# Altium PCB PA_Combined_RX_TX.PcbDoc (part 3 of 3)
Units mil, origin at the board's own origin, x right, y up, seen from the top; angles counter-clockwise.
Board outline 4035 x 2725 mil, 4 copper layers (Top Layer, Layer 1, Layer 2, Bottom Layer), stack 23.756 mil thick; 184 components, 134 nets, 615 pads, 730 vias.
Unrouted connection lines stored in the file: 3.
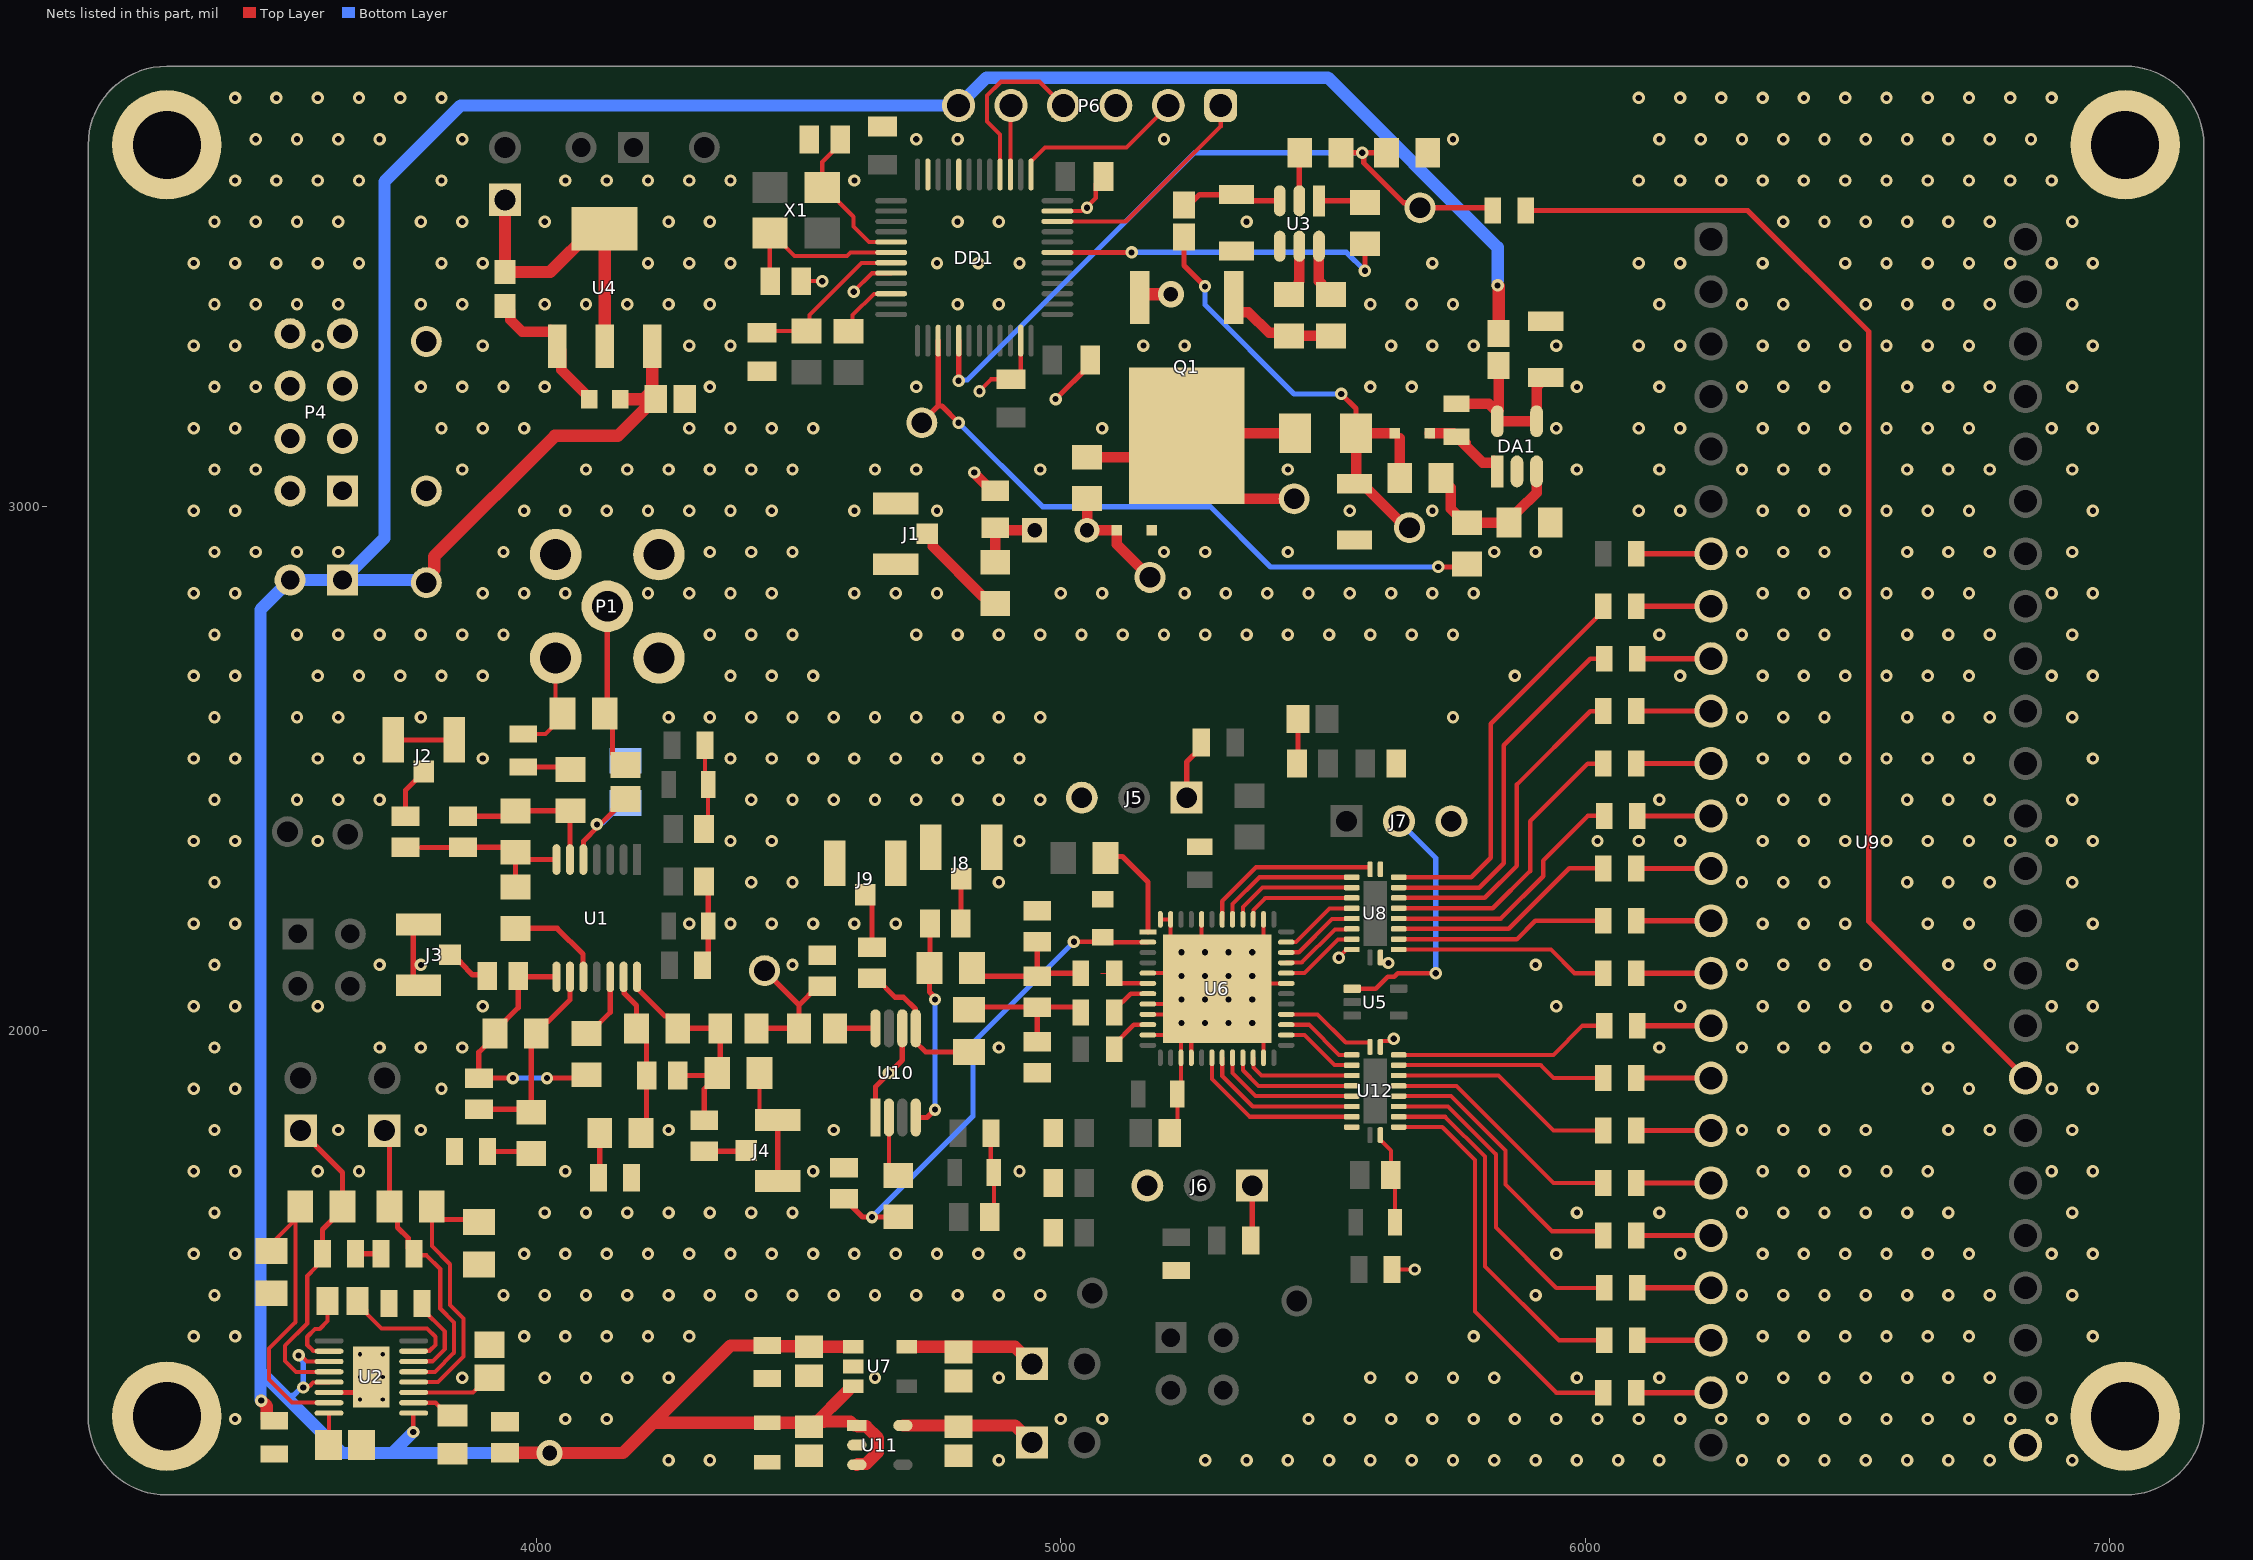
[diagram p4: the nets of this part, all layers, seen from the top]

## Via types
v1: diameter 23.62, hole 11.81, Top Layer to Bottom Layer, tented both sides, 656 vias
v2: diameter 23.62, hole 11.81, Top Layer to Bottom Layer, 66 vias
v3: diameter 19.68, hole 7.87, Top Layer to Bottom Layer, 6 vias
v4: diameter 50, hole 28, Top Layer to Bottom Layer, 2 vias

## Nets (pads, with @x,y where several pads share a name; then routed paths per layer and width w, separated by ;. In a path a pad name is that pad's centre, name@x,y a point inside that pad or via, vN(x,y) a via of type N, cw(c..) or ccw(c..) an arc to the next point about the centre after c; other vN are vias at no path point) (continued)
ADC_VCM: C49.1 C55.1 R40.1 U6.2 | length 958.5
  Top Layer w7.87: C55.1@4578.78,1680 C55.1@4586.65,1680 ; R40.1@4689.37,1645 R40.1@4690,1645.63 ; v2(5025,2170) 5071.42,2170 C49.1@5080,2178.58
  Top Layer w8.66: C49.1@5080,2168.58 5080.79,2169.37 U6.2@5166.12,2169.37
  Top Layer w10: C55.1@4584.53,1682.13 4621.65,1645 v2(4640,1645) R40.1@4689.37,1645
  Bottom Layer w10: v2(4640,1645) 4832.5,1837.5 4832.5,1977.5 v2(5025,2170)
ENC: DD1.10 R29.2 | length 124.6
  Top Layer w7.87: R29.2@4595,3334.37 4603.05,3342.42 4603.05,3365.19 4643.58,3405.73 4676.16,3405.73 DD1.10@4676.54,3406.1
GND: C1.2 C2.2 C3.2 C4.2 C5.2 C6.2 C7.1 C8.1 C9.2 C10.2 C11.2 C17.2 C20.2 C22.2 C23.2 C24.1 C29.1 C30.1 C31.2 C32.2 C33.1 C34.1 C35.2 C36.1 C37.2 C38.2 C39.2 C40.2 C41.2 C42.2 C43.2 C44.1 C45.2 C46.2 C47.2 C48.2 C49.2 C50.2 C51.1 C52.1 C54.1 C55.2 C57.1 C58.1 C59.2 C60.2 C63.2 C64.2 C65.2 C69.1 C70.2 C71.2 C72.2 C73.2 C74.2 D2.2 DA1.2 DD1.8 DD1.23 DD1.35 DD1.44 DD1.47 J1.2 J1.3 J2.2 J2.3 J3.2 J3.3 J4.2 J4.3 J5.3 J6.3 J7.3 J8.2 J8.3 J9.2 J9.3 P1.2 P4.1 P4.2 P4.3 P4.4 P4.5 P4.6 P4.7 P4.8 P6.3 pad.1 Q1.3 R2.1 R3.2 R4.1 R9.1 R10.1 R12.1 R24.1 R25.1 R28.1 R33.1 TP11.1 TP12.1 U2.14 U2.17 U3.4 U4.1 U6.5 U6.8 U6.9 U6.11 U6.15 U6.16 U6.23 U6.31 U6.38 U6.44 U6.47 U6.48 U6.49 U7.2 U8.1 U8.10 U8.19 U9.25 U10.1 U10.6 U11.2 U12.1 U12.10 U12.19 | length 4489.7
  Top Layer w7.87: C20.2@3975,2566.5 4017.05,2566.5 4049.65,2599.09 R9.1@4049.65,2605 4036.57,2618.07 P1.2@4036.57,2711.57 ; C9.2@4316.5,2125 C9.2@4327.4,2135.91 ; C11.2@4319.53,2285 C11.2@4327.4,2277.13 ; C5.2@4319.53,2385 4327.4,2392.87 C4.2@4327.4,2470 4321.5,2475.91 C3.2@4321.5,2545 ; R12.1@4425.35,1920 4425.35,1846.73 4442.09,1830 J4.3@4460,1830 ; C33.1@4505,3430 v2(4545,3430) ; v2(4605,3410) 4640.1,3445.1 4676.16,3445.1 DD1.8@4676.54,3445.47 ; v2(4845,3220) 4845,3220.95 4866.89,3242.84 C40.2@4905,3242.84 ; C65.2@4864.53,1645 4872.4,1652.87 C64.2@4872.4,1730 4866.5,1735.9 C63.2@4866.5,1805 ; C40.2@4908.82,3242.84 4923.58,3257.6 DD1.23@4923.58,3316.54 ; DD1.35@4993.46,3563.58 4993.84,3563.96 5039.7,3563.96 5045.74,3570 v2(5050,3570) ; v2@5049.55,3571.84 5066.65,3588.94 5066.65,3615.24 C43.2@5081.42,3630 ; U6.11@5166.12,1992.21 5198.65,1992.21 5223.75,2017.31 5223.75,2021.25 U6.49@5234.09,2031.58 ; U6.9@5166.12,2031.58 U6.49@5234.09,2031.58 ; U6.8@5166.12,2051.26 U6.49@5251.38,2051.26 ; U6.5@5166.12,2110.32 U6.49@5268.53,2110.32 ; U6.48@5189.79,2212.73 U6.47@5209.48,2212.73 5209.48,2169.37 U6.49@5268.53,2110.32 ; C69.1@5205.12,1805 5222.4,1822.28 C71.2@5222.4,1880 ; C71.2@5217.4,1880 5217.4,1891.81 5229.16,1903.57 U6.15@5229.16,1948.85 U6.49@5229.16,2011.89 ; v2(5230,2015) 5246.58,2031.58 U6.49@5248.85,2031.58 ; v2(5230,2060) 5242.64,2060 U6.49@5251.38,2051.26 ; U6.16@5248.85,1948.85 U6.49@5248.85,2031.58 ; U6.44@5268.53,2212.73 U6.49@5268.53,2110.32 ; U6.23@5386.64,1948.85 5386.64,1992.21 U6.49@5298.06,2080.79 ; U6.38@5386.64,2212.73 5386.64,2169.37 U6.49@5307.9,2090.63 ; U6.31@5430,2090.63 U6.49@5307.9,2090.63 ; C48.2@5450.47,2510 C48.2@5452.44,2511.97 ; v2(5530.41,2139.59) 5530.41,2140.56 5545.16,2155.31 U8.19@5555,2155.31 ; U12.1@5609.53,1801.42 5609.53,1791.58 5629.53,1771.58 C47.2@5629.53,1725 5637.4,1717.13 C46.2@5637.4,1635 ; U12.10@5609.53,1969.53 5609.53,1979.37 5610.71,1980.55 5626.29,1980.55 5630.74,1985 v2(5635,1985) ; U8.1@5609.53,2140.16 5609.53,2131.85 5610.71,2130.67 5623.66,2130.67 v2(5624.84,2129.49) ; C45.2@5631.5,1545 v2(5675,1545) ; U6.49@5234.09,2031.58 5283.3,2080.79 U6.49@5298.06,2080.79 ; U6.49@5234.09,2031.58 U6.49@5248.85,2031.58 ; U6.49@5248.85,2031.58 U6.49@5268.53,2051.26 ; U6.49@5251.38,2051.26 U6.49@5268.53,2051.26 ; U6.49@5268.53,2051.26 U6.49@5298.06,2080.79 ; U6.49@5268.53,2110.32 U6.49@5298.06,2080.79 ; U6.49@5298.06,2080.79 U6.49@5307.9,2090.63
  Top Layer w10: U2.14@3604.29,1310.47 3655.47,1310.47 U2.17@3685,1340 ; C1.2@3655,1575 C17.2@3703.5,1575 ; J2.3@3726.93,2555 J2.2@3843.07,2555 ; J3.3@3765,2083.86 J3.2@3765,2200 ; U4.1@4026.73,3341.93 4039.45,3329.21 U4.1@4039.45,3305.59 ; C9.2@4327.4,2135.91 C10.2@4327.4,2200 C11.2@4327.4,2277.13 ; J4.2@4460,1713.86 J4.3@4460,1830 ; U10.1@4646.61,1834.97 4646.61,1893.67 4672.2,1919.27 v2(4672.2,1919.68) ; v2@4672.41,1919.48 4697.8,1944.86 U10.6@4697.8,2005.03 ; v2@4835,3063.54 v2(4835,3065) ; R25.1@4868.11,3030.43 R25.1@4875,3030.43 ; v2(4990,3205) 4990.28,3205 5056.42,3271.14 C41.2@5056.42,3280 ; Q1.3@5150.24,3398.78 Q1.3@5156.46,3405 ; C48.2@5452.44,2511.97 C44.1@5452.44,2595
  Top Layer w20: C32.2@3940,3382.44 3949.92,3372.52 3949.92,3356.13 3972.44,3333.61 4031.73,3333.61 4039.45,3325.89 U4.1@4039.45,3305.59 4047.16,3297.87 4047.16,3260.73 4094.72,3213.17 4094.72,3210.75 C31.2@4100.47,3205 ; v2@4835,3063.54 R25.1@4868.11,3030.43
  Top Layer w23.62: TP11.1@3780.41,3315 TP11.1@3790,3315 ; Q1.3@5156.46,3405 v4(5210,3405)
  other v1: 4251.97,1181.1 4330.71,1181.1 4881.89,1181.1 5275.59,1181.1 5354.33,1181.1 5433.07,1181.1 5511.81,1181.1 5590.55,1181.1 5669.29,1181.1 5748.03,1181.1 5826.77,1181.1 5905.52,1181.1 5984.26,1181.1 6063,1181.1 6141.74,1181.1 6299.22,1181.1 6377.96,1181.1 6456.7,1181.1 6535.44,1181.1 6614.18,1181.1 6692.92,1181.1 6771.66,1181.1 6929.14,1181.1 3425.2,1259.84 4055.12,1259.84 4133.86,1259.84 5000,1259.84 5078.74,1259.84 5472.44,1259.84 5551.18,1259.84 5629.92,1259.84 5708.66,1259.84 5787.4,1259.84 5866.14,1259.84 5944.89,1259.84 6023.63,1259.84 6102.37,1259.84 6181.11,1259.84 6259.85,1259.84 6338.59,1259.84 6417.33,1259.84 6496.07,1259.84 6574.81,1259.84 6653.55,1259.84 6732.29,1259.84 6811.03,1259.84 6889.77,1259.84 3858.27,1338.58 4015.75,1338.58 4094.49,1338.58 4173.23,1338.58 4251.97,1338.58 4645.67,1338.58 4881.89,1338.58 5590.55,1338.58 5669.29,1338.58 5748.03,1338.58 5826.77,1338.58 5984.26,1338.58 6141.74,1338.58 6299.22,1338.58 6377.96,1338.58 6456.7,1338.58 6535.44,1338.58 6614.18,1338.58 6692.92,1338.58 6771.66,1338.58 3346.46,1417.32 3425.2,1417.32 3976.38,1417.32 4055.12,1417.32 4133.86,1417.32 4212.6,1417.32 4291.34,1417.32 5787.4,1417.32 6338.59,1417.32 6417.33,1417.32 6496.07,1417.32 6574.81,1417.32 6653.55,1417.32 6732.29,1417.32 6968.51,1417.32 3385.83,1496.06 3937.01,1496.06 4015.75,1496.06 4094.49,1496.06 4173.23,1496.06 4251.97,1496.06 4330.71,1496.06 4409.45,1496.06 4488.19,1496.06 4566.93,1496.06 4645.67,1496.06 4724.41,1496.06 4803.15,1496.06 4881.89,1496.06 4960.63,1496.06 5905.52,1496.06 6299.22,1496.06 6377.96,1496.06 6456.7,1496.06 6535.44,1496.06 6614.18,1496.06 6692.92,1496.06 6771.66,1496.06 6929.14,1496.06 3346.46,1574.8 3425.2,1574.8 3976.38,1574.8 4055.12,1574.8 4133.86,1574.8 4212.6,1574.8 4291.34,1574.8 4370.08,1574.8 4448.82,1574.8 4527.56,1574.8 4606.3,1574.8 4685.04,1574.8 4763.78,1574.8 4842.52,1574.8 4921.26,1574.8 5944.89,1574.8 6181.11,1574.8 6338.59,1574.8 6417.33,1574.8 6496.07,1574.8 6574.81,1574.8 6653.55,1574.8 6732.29,1574.8 6889.77,1574.8 6968.51,1574.8 3385.83,1653.54 4015.75,1653.54 4094.49,1653.54 4173.23,1653.54 4251.97,1653.54 4330.71,1653.54 4409.45,1653.54 4488.19,1653.54 5984.26,1653.54 6141.74,1653.54 6299.22,1653.54 6377.96,1653.54 6456.7,1653.54 6535.44,1653.54 6614.18,1653.54 6692.92,1653.54 6929.14,1653.54 3346.46,1732.28 3425.2,1732.28 3582.68,1732.28 3661.42,1732.28 4055.12,1732.28 4527.56,1732.28 4921.26,1732.28 6338.59,1732.28 6417.33,1732.28 6496.07,1732.28 6574.81,1732.28 6653.55,1732.28 6889.77,1732.28 6968.51,1732.28 3385.83,1811.02 3622.05,1811.02 3779.53,1811.02 4251.97,1811.02 4566.93,1811.02 6299.22,1811.02 6377.96,1811.02 6456.7,1811.02 6535.44,1811.02 6692.92,1811.02 6771.66,1811.02 6929.14,1811.02 3346.46,1889.76 3425.2,1889.76 3818.9,1889.76 6653.55,1889.76 6732.29,1889.76 6889.77,1889.76 6968.51,1889.76 3385.83,1968.51 3700.79,1968.51 3779.53,1968.51 3858.27,1968.51 4881.89,1968.51 6141.74,1968.51 6299.22,1968.51 6377.96,1968.51 6456.7,1968.51 6535.44,1968.51 6614.18,1968.51 6692.92,1968.51 6929.14,1968.51 3346.46,2047.25 3425.2,2047.25 3582.68,2047.25 3897.64,2047.25 5944.89,2047.25 6181.11,2047.25 6338.59,2047.25 6417.33,2047.25 6496.07,2047.25 6574.81,2047.25 6653.55,2047.25 6889.77,2047.25 6968.51,2047.25 3385.83,2125.99 3700.79,2125.99 3779.53,2125.99 4488.19,2125.99 5905.52,2125.99 6299.22,2125.99 6377.96,2125.99 6456.7,2125.99 6535.44,2125.99 6692.92,2125.99 6771.66,2125.99 6929.14,2125.99 3346.46,2204.73 3425.2,2204.73 4291.34,2204.73 4370.08,2204.73 4448.82,2204.73 4527.56,2204.73 4606.3,2204.73 4685.04,2204.73 6338.59,2204.73 6417.33,2204.73 6496.07,2204.73 6653.55,2204.73 6732.29,2204.73 6968.51,2204.73 3385.83,2283.47 4409.45,2283.47 4488.19,2283.47 4881.89,2283.47 6299.22,2283.47 6377.96,2283.47 6456.7,2283.47 6614.18,2283.47 6692.92,2283.47 6771.66,2283.47 6929.14,2283.47 3346.46,2362.21 3425.2,2362.21 3582.68,2362.21 4370.08,2362.21 4448.82,2362.21 4921.26,2362.21 6023.63,2362.21 6102.37,2362.21 6181.11,2362.21 6338.59,2362.21 6417.33,2362.21 6496.07,2362.21 6574.81,2362.21 6653.55,2362.21 6732.29,2362.21 6811.03,2362.21 6889.77,2362.21 6968.51,2362.21 3385.83,2440.95 3543.31,2440.95 3622.05,2440.95 3700.79,2440.95 4409.45,2440.95 4488.19,2440.95 4566.93,2440.95 4645.67,2440.95 4724.41,2440.95 4803.15,2440.95 4881.89,2440.95 4960.63,2440.95 6141.74,2440.95 6299.22,2440.95 6377.96,2440.95 6456.7,2440.95 6614.18,2440.95 6692.92,2440.95 6771.66,2440.95 6929.14,2440.95 3346.46,2519.69 3425.2,2519.69 3582.68,2519.69 3661.42,2519.69 3897.64,2519.69 4370.08,2519.69 4448.82,2519.69 4527.56,2519.69 4606.3,2519.69 4685.04,2519.69 4763.78,2519.69 4842.52,2519.69 4921.26,2519.69 6338.59,2519.69 6417.33,2519.69 6496.07,2519.69 6574.81,2519.69 6653.55,2519.69 6732.29,2519.69 6968.51,2519.69 3385.83,2598.43 3543.31,2598.43 3622.05,2598.43 3779.53,2598.43 4251.97,2598.43 4330.71,2598.43 4409.45,2598.43 4488.19,2598.43 4566.93,2598.43 4645.67,2598.43 4724.41,2598.43 4803.15,2598.43 4881.89,2598.43 4960.63,2598.43 5748.03,2598.43 6299.22,2598.43 6377.96,2598.43 6456.7,2598.43 6614.18,2598.43 6692.92,2598.43 6771.66,2598.43 6929.14,2598.43 3346.46,2677.17 3425.2,2677.17 3582.68,2677.17 3661.42,2677.17 3740.16,2677.17 3818.9,2677.17 3897.64,2677.17 4370.08,2677.17 4448.82,2677.17 4527.56,2677.17 5866.14,2677.17 6181.11,2677.17 6338.59,2677.17 6417.33,2677.17 6496.07,2677.17 6574.81,2677.17 6653.55,2677.17 6732.29,2677.17 6889.77,2677.17 6968.51,2677.17 3385.83,2755.91 3543.31,2755.91 3622.05,2755.91 3700.79,2755.91 3779.53,2755.91 3858.27,2755.91 3937.01,2755.91 4330.71,2755.91 4409.45,2755.91 4488.19,2755.91 4724.41,2755.91 4803.15,2755.91 4881.89,2755.91 4960.63,2755.91 5039.37,2755.91 5118.11,2755.91 5196.85,2755.91 5275.59,2755.91 5354.33,2755.91 5433.07,2755.91 5511.81,2755.91 5590.55,2755.91 5669.29,2755.91 5748.03,2755.91 6141.74,2755.91 6299.22,2755.91 6377.96,2755.91 6456.7,2755.91 6614.18,2755.91 6692.92,2755.91 6771.66,2755.91 6929.14,2755.91 3346.46,2834.65 3425.2,2834.65 3897.64,2834.65 3976.38,2834.65 4055.12,2834.65 4212.6,2834.65 4291.34,2834.65 4370.08,2834.65 4448.82,2834.65 4606.3,2834.65 4685.04,2834.65 4763.78,2834.65 5000,2834.65 5078.74,2834.65 5236.22,2834.65 5314.96,2834.65 5393.7,2834.65 5472.44,2834.65 5551.18,2834.65 5629.92,2834.65 5708.66,2834.65 5787.4,2834.65 6338.59,2834.65 6417.33,2834.65 6496.07,2834.65 6574.81,2834.65 6653.55,2834.65 6732.29,2834.65 6889.77,2834.65 6968.51,2834.65 3385.83,2913.39 3464.57,2913.39 3543.31,2913.39 3622.05,2913.39 3937.01,2913.39 4330.71,2913.39 4409.45,2913.39 4488.19,2913.39 5196.85,2913.39 5275.59,2913.39 5433.07,2913.39 5826.77,2913.39 5905.52,2913.39 6299.22,2913.39 6377.96,2913.39 6456.7,2913.39 6614.18,2913.39 6692.92,2913.39 6771.66,2913.39 6929.14,2913.39 3346.46,2992.13 3425.2,2992.13 3976.38,2992.13 4055.12,2992.13 4133.86,2992.13 4212.6,2992.13 4291.34,2992.13 4370.08,2992.13 4448.82,2992.13 4606.3,2992.13 4763.78,2992.13 5551.18,2992.13 5708.66,2992.13 6102.37,2992.13 6181.11,2992.13 6338.59,2992.13 6417.33,2992.13 6496.07,2992.13 6574.81,2992.13 6653.55,2992.13 6732.29,2992.13 6968.51,2992.13 3385.83,3070.87 3464.57,3070.87 3858.27,3070.87 4094.49,3070.87 4173.23,3070.87 4251.97,3070.87 4330.71,3070.87 4409.45,3070.87 4488.19,3070.87 4645.67,3070.87 4724.41,3070.87 4960.63,3070.87 5433.07,3070.87 5984.26,3070.87 6141.74,3070.87 6299.22,3070.87 6377.96,3070.87 6456.7,3070.87 6614.18,3070.87 6692.92,3070.87 6771.66,3070.87 6929.14,3070.87 3346.46,3149.61 3425.2,3149.61 3818.9,3149.61 3897.64,3149.61 3976.38,3149.61 4291.34,3149.61 4370.08,3149.61 4448.82,3149.61 4527.56,3149.61 5078.74,3149.61 5944.89,3149.61 6102.37,3149.61 6181.11,3149.61 6338.59,3149.61 6417.33,3149.61 6496.07,3149.61 6574.81,3149.61 6653.55,3149.61 6732.29,3149.61 6889.77,3149.61 6968.51,3149.61 3385.83,3228.35 3464.57,3228.35 3779.53,3228.35 3858.27,3228.35 3937.01,3228.35 4015.75,3228.35 4330.71,3228.35 4724.41,3228.35 5590.55,3228.35 5669.29,3228.35 5984.26,3228.35 6141.74,3228.35 6299.22,3228.35 6377.96,3228.35 6456.7,3228.35 6614.18,3228.35 6692.92,3228.35 6771.66,3228.35 6929.14,3228.35 3346.46,3307.09 3425.2,3307.09 3582.68,3307.09 3897.64,3307.09 4291.34,3307.09 4370.08,3307.09 5157.48,3307.09 5236.22,3307.09 5629.92,3307.09 5708.66,3307.09 5787.4,3307.09 5944.89,3307.09 6102.37,3307.09 6181.11,3307.09 6338.59,3307.09 6417.33,3307.09 6496.07,3307.09 6574.81,3307.09 6653.55,3307.09 6732.29,3307.09 6968.51,3307.09 3385.83,3385.83 3464.57,3385.83 3543.31,3385.83 3622.05,3385.83 3779.53,3385.83 3858.27,3385.83 4015.75,3385.83 4094.49,3385.83 4173.23,3385.83 4251.97,3385.83 4330.71,3385.83 4803.15,3385.83 4881.89,3385.83 5590.55,3385.83 5669.29,3385.83 5748.03,3385.83 6141.74,3385.83 6299.22,3385.83 6377.96,3385.83 6535.44,3385.83 6614.18,3385.83 6692.92,3385.83 6771.66,3385.83 6929.14,3385.83 3346.46,3464.57 3425.2,3464.57 3503.94,3464.57 3582.68,3464.57 3661.42,3464.57 3818.9,3464.57 3897.64,3464.57 4212.6,3464.57 4291.34,3464.57 4370.08,3464.57 4763.78,3464.57 4842.52,3464.57 4921.26,3464.57 5708.66,3464.57 6102.37,3464.57 6181.11,3464.57 6338.59,3464.57 6496.07,3464.57 6574.81,3464.57 6653.55,3464.57 6732.29,3464.57 6811.03,3464.57 6889.77,3464.57 6968.51,3464.57 3385.83,3543.31 3464.57,3543.31 3543.31,3543.31 3622.05,3543.31 3779.53,3543.31 3858.27,3543.31 4015.75,3543.31 4251.97,3543.31 4330.71,3543.31 4803.15,3543.31 4881.89,3543.31 5354.33,3543.31 6377.96,3543.31 6456.7,3543.31 6535.44,3543.31 6614.18,3543.31 6692.92,3543.31 6771.66,3543.31 6929.14,3543.31 3425.2,3622.05 3503.94,3622.05 3582.68,3622.05 3661.42,3622.05 3818.9,3622.05 4055.12,3622.05 4133.86,3622.05 4212.6,3622.05 4291.34,3622.05 4370.08,3622.05 4606.3,3622.05 6102.37,3622.05 6181.11,3622.05 6259.85,3622.05 6338.59,3622.05 6417.33,3622.05 6496.07,3622.05 6574.81,3622.05 6653.55,3622.05 6732.29,3622.05 6811.03,3622.05 6889.77,3622.05 3464.57,3700.79 3543.31,3700.79 3622.05,3700.79 3700.79,3700.79 3858.27,3700.79 4724.41,3700.79 4803.15,3700.79 5196.85,3700.79 5748.03,3700.79 6141.74,3700.79 6220.48,3700.79 6299.22,3700.79 6377.96,3700.79 6456.7,3700.79 6535.44,3700.79 6614.18,3700.79 6692.92,3700.79 6771.66,3700.79 6850.4,3700.79 3425.2,3779.53 3503.94,3779.53 3582.68,3779.53 3661.42,3779.53 3740.16,3779.53 3818.9,3779.53 6102.37,3779.53 6181.11,3779.53 6259.85,3779.53 6338.59,3779.53 6417.33,3779.53 6496.07,3779.53 6574.81,3779.53 6653.55,3779.53 6732.29,3779.53 6811.03,3779.53 6889.77,3779.53
  other v2: 5275,2015 5320,2015 5365,2015 5275,2060 5320,2060 5365,2060 5230,2105 5275,2105 5320,2105 5365,2105 5230,2150 5275,2150 5320,2150 5365,2150
  other v3: 3663.35,1296.69 3706.65,1296.69 3663.35,1340 3706.65,1340 3663.35,1383.31 3706.65,1383.31
LASER_DAC: DD1.15 R27.1 TP7.1 | length 1307.8
  Top Layer w10: TP7.1@4735,3160 4735,3160.77 4766.1,3191.87 ; DD1.15@4766.1,3316.54 4766.1,3191.87 ; v2(4805,3160) 4773.13,3191.87 4766.1,3191.87 ; v2(5720,2885) 5769.37,2885 R27.1@5775,2890.63
  Bottom Layer w10: v2(4805,3160) 4965,3000 5285,3000 5400,2885 v2(5720,2885)
LASER_PULSE: DD1.17 R20.2 R24.2 R60.2 TP8.1 | length 1401.8
  Top Layer w10: v2(4805,3240) 4805.47,3240.47 4805.47,3270.79 4805.24,3271.02 DD1.17@4805.24,3316.54 ; R20.2@5545.28,3675 v2(5575,3675) 5577.61,3672.39 5577.61,3655.77 5653.99,3579.39 5675.61,3579.39 TP8.1@5685,3570 5818.5,3570 R60.2@5823.5,3565 ; v2@5580,3675 R24.2@5621.26,3675
  Bottom Layer w10: v2(4805,3240) 4806.46,3241.46 4821.46,3241.46 5255,3675 v2(5575,3675)
LTC3260_ADJ+: R1.1 R2.2 U2.15 | length 599.1
  Top Layer w7.87: R2.2@3500,1600 R1.1@3540,1640 ; U2.15@3608.8,1291.16 3533.84,1291.16 3490,1335 3490,1394.47 3540,1444.47 R1.1@3540,1640 ; R1.1@3540,1640 3565,1665 R1.1@3549.29,1665 3540,1655.71 R1.1@3540,1640
LTC3260_ADJ-: R3.1 R5.2 U2.4 | length 529.2
  Top Layer w7.87: U2.4@3765.71,1330.16 3812.11,1330.16 3860.83,1378.88 3860.83,1451.52 3835,1477.35 3835,1555 3800.35,1589.65 R5.2@3800.35,1659.96
  Top Layer w10: R5.2@3800.35,1665 3800.35,1659.96 3819.96,1640.35 R3.1@3895,1640.35
LTC3260_BYP+: C7.2 U2.16 | length 61.4
  Top Layer w7.87: C7.2@3603.5,1210 3604.29,1210.79 U2.16@3604.29,1271.1
LTC3260_BYP-: C8.2 U2.3 | length 155.9
  Top Layer w7.87: U2.3@3765.71,1310.47 3879.02,1310.47 3907.05,1338.5 C8.2@3910,1338.5
LTC3260_LDO+: C1.1 R1.2 U2.12 W1.1 | length 610.3
  Top Layer w7.87: C1.1@3592.01,1575 3579.7,1562.7 3579.7,1549.7 3562.8,1532.8 3562.8,1441.99 3520.49,1399.68 3520.49,1370.57 3541.21,1349.84 U2.12@3604.29,1349.84
  Top Layer w10: W1.1@3550,1810 3630,1730 R1.2@3630,1665 3630,1659.09 3592.01,1621.1 C1.1@3592.01,1575
LTC3260_LDO-: C17.1 R5.1 U2.5 W2.1 | length 583.2
  Top Layer w7.87: U2.5@3765.71,1349.84 3806.52,1349.84 3842.95,1386.28 3842.95,1444.12 3816.44,1470.63 3816.44,1545.59 3789.93,1572.1 3769.39,1572.1 C17.1@3766.5,1575
  Top Layer w10: W2.1@3710,1810 3719.65,1800.35 R5.1@3719.65,1665 3735,1649.65 3735,1625 3755.26,1604.74 3755.26,1586.24 C17.1@3766.5,1575
NetC6_1: C6.1 U2.6 | length 173.7
  Top Layer w7.87: U2.6@3765.71,1369.53 3766.09,1369.9 3801.3,1369.9 3825.08,1393.68 3825.08,1426.57 3781.5,1470.16 C6.1@3781.5,1480
NetC12_1: C12.1 J2.1 | length 99.9
  Top Layer w10: C12.1@3750,2409.53 3750,2458.97 3785,2493.98 J2.1@3785,2494.96
NetC12_2: C12.2 C18.2 R6.1 R11.2 U1.7 | length 332
  Top Layer w10: 3779.53,2350 3859.53,2350 C18.2@3860,2350.47 3950.16,2350.47 R11.2@3960,2340.63 R6.1@3960,2274.37 ; R11.2@3964.96,2345.59 3983.69,2326.86 U1.7@4038.23,2326.86
NetC13_1: C13.1 J3.1 | length 83
  Top Layer w10: J3.1@3840.04,2145 3841.02,2145 3855.71,2130.31 3855.71,2129.33 3878.1,2106.94 3904.01,2106.94 C13.1@3905.94,2105
NetC13_2: C13.2 C19.2 R7.1 R13.2 U1.8 | length 508.3
  Top Layer w10: v2(3955,1910) 3890.47,1910 C19.2@3890,1909.53 3890,1959.45 3920.63,1990.08 R13.2@3920.63,1995 3920.63,1999.92 3965,2044.29 C13.2@3965,2105 3966.86,2103.14 U1.8@4038.23,2103.14 ; v2(4020,1910) 4088.74,1910 R7.1@4095,1916.26
  Bottom Layer w10: v2(3955,1910) v2(4020,1910)
NetC14_1: C14.1 J4.1 | length 80.6
  Top Layer w10: C14.1@4320,1770.47 4398.5,1770.47 J4.1@4399.96,1771.93
NetC14_2: C14.2 C21.2 R8.1 R12.2 R14.2 U1.14 | length 478.8
  Top Layer w10: U1.14@4191.77,2103.14 4191.77,2081.34 4244.57,2028.54 4250.75,2028.54 4269.37,2009.92 R14.2@4269.37,2005 R8.1@4350.55,2005 4350.55,1920 4320,1889.45 C14.2@4320,1829.53 ; C21.2@4269.06,1915 R12.2@4344.65,1915
NetC15_1: C15.1 U2.10 | length 151.5
  Top Layer w7.87: C15.1@3601.43,1485 3601.43,1446.49 3586.53,1431.6 3577.69,1431.6 3562.8,1416.71 3562.8,1401.09 3574.29,1389.59 3603.92,1389.59 U2.10@3604.29,1389.21
NetC15_2: C15.2 U2.7 | length 243.1
  Top Layer w7.87: C15.2@3658.57,1485 3675.4,1468.18 3675.4,1461.07 3704.04,1432.43 3791.49,1432.43 3807.21,1416.71 3807.21,1401.09 3796.16,1390.04 3790.57,1390.04 3790.12,1389.59 3766.09,1389.59 U2.7@3765.71,1389.21
NetC16_1: C16.1 P1.1 R9.2 | length 323.2
  Top Layer w10: P1.1@4135,2810 4135,2609.65 R9.2@4130.35,2605 4145,2590.35 4145,2528.54 4166.03,2507.51 C16.1@4170,2507.51
NetC16_2: C16.2 R10.2 U1.5 | length 228
  Top Layer w10: U1.5@4089.41,2326.86 4089.41,2361.9 v2@4117.87,2390.36 ; v2(4115.21,2393.91) 4114.77,2393.46 v2@4117.87,2390.36 ; C16.2@4170,2442.49 4166.03,2442.49 4146.33,2422.79 4146.33,2418.82 v2@4117.87,2390.36
  Bottom Layer w10: v2(4115.21,2393.91) 4117.82,2396.51 4125.96,2396.51 4164.09,2434.65 R10.2@4170,2434.65
NetC18_1: C18.1 R11.1 R15.1 U1.6 | length 298.3
  Top Layer w10: C18.1@3860,2409.53 3950.16,2409.53 R11.1@3960,2419.37 ; R11.1@3964.37,2420 R15.1@4065,2420 4063.82,2418.82 U1.6@4063.82,2326.86
NetC19_1: C19.1 R13.1 R16.1 U1.9 | length 393.9
  Top Layer w10: C19.1@3890,1850.47 3984.53,1850.47 R16.1@3990,1845 3990,1985.63 R13.1@3999.37,1995 3999.37,1999.92 4017.99,2018.54 4022.91,2018.54 4063.82,2059.45 U1.9@4063.82,2103.14
NetC20_1: C20.1 R15.2 | length 92
  Top Layer w10: C20.1@3975,2503.5 4060.24,2503.5 R15.2@4065,2498.74
NetC21_1: C21.1 R14.1 R17.1 U1.13 | length 296.6
  Top Layer w10: U1.13@4166.18,2103.14 4167.14,2102.19 4167.14,2072.04 4190.63,2048.54 R14.1@4190.63,2005 4190.63,2000.08 4210,1980.71 C21.1@4210,1915 4210,1825.63 R17.1@4210.63,1825
NetC22_1: C22.1 R16.2 | length 90.1
  Top Layer w10: C22.1@3901.5,1770 3986.26,1770 R16.2@3990,1766.26
NetC23_1: C23.1 R17.2 | length 85.9
  Top Layer w10: C23.1@4118.5,1720 4120.63,1722.13 R17.2@4120.63,1805
NetC24_2: C24.2 L1.2 U3.3 | length 190.4
  Top Layer w10: L1.2@5245,3570.55 5245,3575.43 5264.57,3595 C24.2@5335,3595 5346.67,3583.33 U3.3@5417.6,3583.33
NetC25_1: C25.1 D1.2 D2.1 TP9.1 | length 233.5
  Top Layer w20: C25.1@5050,3015.63 D1.2@5050,2955 D2.1@5106.54,2955 5106.54,2928.46 TP9.1@5170,2865
NetC25_2: C25.2 Q1.2 R18.1 TP10.1 | length 679.1
  Top Layer w10: Q1.2@5199.37,3094.37 Q1.2@5240,3135 ; Q1.2@5245,3140 Q1.2@5240,3135 ; Q1.2@5345.24,3015 5240,3120.24 Q1.2@5240,3135
  Top Layer w20: C25.2@5050,3094.37 Q1.2@5199.37,3094.37 ; Q1.2@5245,3140 R18.1@5446.89,3140 ; Q1.2@5345.24,3015 TP10.1@5445,3015
NetC30_2: C30.2 DA1.4 DA1.5 L2.1 L3.1 | length 358.9
  Top Layer w20: L3.1@5755,3196.5 5816.11,3196.5 DA1.5@5832.6,3180 ; L2.1@5835,3269.45 5835,3184.62 5832.6,3182.22 DA1.5@5832.6,3180 ; C30.2@5907.4,3233.15 DA1.4@5907.4,3162.85 DA1.5@5832.6,3162.85 DA1.5@5832.6,3180 ; C30.2@5909.6,3230.95 C30.2@5925,3246.36
NetC32_1: C32.1 U4.2 U4.4 W3.1 | length 586
  Top Layer w10: U4.4@4108.35,3530 U4.4@4130,3530
  Top Layer w23.62: W3.1@3940,3585 C32.1@3940,3447.56 4025.9,3447.56 U4.4@4108.35,3530 ; U4.2@4130,3305.59 U4.4@4130,3530
NetC33_2: C33.2 DD1.6 X1.1 | length 344.4
  Top Layer w7.87: C33.2@4445.94,3430 4445,3430.94 X1.1@4445,3521.69 4448.94,3521.69 4492.4,3478.23 4592.09,3478.23 4598.71,3484.84 DD1.6@4676.54,3484.84
NetC34_2: C34.2 DD1.5 X1.3 | length 292
  Top Layer w7.87: C34.2@4579.53,3700 4579.53,3692.13 4545,3657.6 X1.3@4545,3608.31 4548.94,3608.31 4604.37,3552.87 4604.37,3534.37 4634.21,3504.53 DD1.5@4676.54,3504.53 ; C34.2@4579.53,3705 C34.2@4580,3704.53
NetC52_2: C52.2 U7.5 W4.1 | length 252.2
  Top Layer w23.62: U7.5@4706.18,1397.4 4912.6,1397.4 W4.1@4945,1365
NetC53_1: C53.1 J8.1 | length 85.2
  Top Layer w10: C53.1@4809.53,2205 4809.53,2289.49 J8.1@4810,2289.96
NetC53_2: C53.2 R46.2 U10.4 | length 402.6
  Top Layer w10: U10.4@4723.39,1834.97 4744.97,1834.97 v2(4760,1850) ; C53.2@4749.53,2205 C53.2@4749.65,2204.88 ; C53.2@4750.47,2205 4750.47,2120.83 R46.2@4749.65,2120 4749.65,2074.04 4760,2063.69 v2(4760,2060)
  Bottom Layer w10: v2(4760,1850) v2(4760,2060)
NetC54_2: C54.2 C56.1 R42.1 R46.1 | length 282.8
  Top Layer w10: R46.1@4830.35,2120 4845.83,2104.53 C56.1@4955,2104.53 ; C54.2@4955,2170.47 C56.1@4955,2104.53 ; R42.1@5038.5,2110 4960.47,2110 C56.1@4955,2104.53
NetC56_2: C56.2 C60.1 R48.1 R52.1 | length 282.8
  Top Layer w10: R52.1@4830.35,2035 4840.83,2045.47 C56.2@4955,2045.47 ; C60.1@4955,1979.53 C56.2@4955,2045.47 ; R48.1@5038.5,2035 5028.03,2045.47 C56.2@4955,2045.47
NetC58_2: C58.2 U11.5 W5.1 | length 259.5
  Top Layer w23.62: U11.5@4698.92,1247.4 4912.6,1247.4 W5.1@4945,1215
NetC61_1: C61.1 R52.2 U10.5 | length 279.9
  Top Layer w10: C61.1@4640,2100.47 4647.87,2100.47 4684.08,2064.27 4700.04,2064.27 4722.54,2041.77 4722.54,2005.88 U10.5@4723.39,2005.03 4723.39,1978.55 4742.29,1959.65 R52.2@4825,1959.65
NetC61_2: C61.2 J9.1 | length 105.8
  Top Layer w10: J9.1@4626.93,2259.96 4640,2246.89 C61.2@4640,2159.53
NetD1_1: D1.1 R21.1 R25.2 | length 142.7
  Top Layer w10: R25.2@4875,2959.57 R25.2@4879.57,2955
  Top Layer w20: R21.1@4875,2893.74 R25.2@4875,2959.57 ; R25.2@4879.57,2955 D1.1@4950,2955
NetD3_1: D3.1 DA1.1 L3.2 | length 207.4
  Top Layer w10: L3.2@5748.5,3140 L3.2@5755,3133.5 ; L3.2@5765.75,3122.76 L3.2@5776.99,3122.76 ; DA1.1@5825.55,3092.46 5832.6,3085.41 DA1.1@5832.6,3067.15
  Top Layer w20: D3.1@5703.46,3140 L3.2@5748.5,3140 ; L3.2@5755,3133.5 5765.75,3122.76 5804.59,3083.92 5830.55,3083.92 5832.6,3081.87 DA1.1@5832.6,3067.15
NetDA1_3: DA1.3 R22.1 R27.2 R28.2 | length 308.7
  Top Layer w10: R22.1@5725,3055 R22.1@5743.62,3036.38 ; R27.2@5770.08,2969.37 R27.2@5775,2969.37 ; R28.2@5850,2969.37 R28.2@5854.92,2969.37 5873.54,2987.99 R28.2@5873.54,2992.91
  Top Layer w20: R22.1@5743.62,3036.38 5743.62,2995.83 R27.2@5770.08,2969.37 ; R27.2@5775,2969.37 R28.2@5850,2969.37 ; R28.2@5873.54,2992.91 5907.4,3026.77 DA1.3@5907.4,3067.15
NetJ1_1: J1.1 R21.2 | length 193.3
  Top Layer w20: J1.1@4745.04,2948.07 4746.02,2948.07 4755.71,2938.39 4755.71,2924.29 4851.38,2828.62 4861.38,2828.62 R21.2@4875,2815
NetJ5_1: J5.1 R32.1 | length 116.4
  Top Layer w8.66: R32.1@5267.52,2540.16 R32.1@5267.52,2550
  Top Layer w10: J5.1@5240,2445 5240,2512.64 R32.1@5267.52,2540.16
NetJ6_1: J6.1 R34.1 | length 106
  Top Layer w7.87: R34.1@5362.48,1600 R34.1@5365,1602.52
  Top Layer w10: R34.1@5365,1602.52 J6.1@5365,1705
NetJ7_2: J7.2 U5.1 | length 490.5
  Top Layer w8.66: U5.1@5555.71,2080.59 5600.57,2080.59 5623.33,2103.35 5635.67,2103.35 5642.32,2110 v2(5715,2110)
  Bottom Layer w10: J7.2@5645,2400 5715,2330 v2(5715,2110)
NetQ1_1: Q1.1 R19.1 R23.1 | length 223.8
  Top Layer w10: Q1.1@5329.76,3398.78 5329.76,3384.64 Q1.1@5343.46,3370.94 ; R23.1@5429.4,3331.23 R23.1@5435,3325.63
  Top Layer w20: Q1.1@5343.46,3370.94 5357.61,3370.94 5397.31,3331.23 R23.1@5429.4,3331.23 ; R23.1@5435,3325.63 R19.1@5515,3325.63
NetR4_2: R4.2 U2.2 | length 84.4
  Top Layer w7.87: U2.2@3765.71,1290.79 3807.76,1290.79 3832.13,1266.42 R4.2@3840,1266.42
NetR6_2: R6.2 U1.10 | length 192.6
  Top Layer w10: R6.2@3960,2195.63 4039.37,2195.63 4088.46,2146.55 4088.46,2104.1 U1.10@4089.41,2103.14
NetR7_2: R7.2 U1.12 | length 129.9
  Top Layer w10: R7.2@4095,1995 4099.92,1995 4140.59,2035.67 U1.12@4140.59,2103.14
NetR19_2: R19.2 U3.6 | length 104.5
  Top Layer w20: U3.6@5492.4,3496.67 5492.4,3429.71 5496.46,3425.65 5496.46,3417.99 5510.08,3404.37 R19.2@5515,3404.37
NetR20_1: R20.1 U3.2 | length 82.3
  Top Layer w10: U3.2@5455,3583.33 R20.1@5455,3665.63
NetR23_2: R23.2 U3.5 | length 103.5
  Top Layer w20: R23.2@5435,3404.37 5439.92,3404.37 5453.54,3417.99 5453.54,3428.25 5455,3429.71 U3.5@5455,3496.67
NetR26_2: R26.2 U3.1 | length 89
  Top Layer w10: U3.1@5492.4,3583.33 5576.67,3583.33 R26.2@5580,3580
NetR35_2: R35.2 U9.7 | length 142
  Top Layer w10: R35.2@6097.99,2910 U9.7@6240,2910
NetR36_1: R36.1 U8.9 | length 760
  Top Layer w8.66: U8.9@5644.37,2293.11 5783.11,2293.11 5820,2330 5820,2586.14 6035,2801.14 R36.1@6035,2810
NetR36_2: R36.2 U9.8 | length 142
  Top Layer w10: R36.2@6097.99,2810 U9.8@6240,2810
NetR37_1: R37.1 U8.8 | length 704.8
  Top Layer w8.66: U8.8@5644.37,2273.42 5798.42,2273.42 5845,2320 5845,2545 6010,2710 R37.1@6036.5,2710
NetR37_2: R37.2 U9.9 | length 140.5
  Top Layer w10: R37.2@6099.49,2710 U9.9@6240,2710
NetR38_1: R38.1 U8.7 | length 629
  Top Layer w8.66: U8.7@5644.37,2253.74 5808.74,2253.74 5870,2315 5870,2470 6010,2610 R38.1@6035,2610
NetR38_2: R38.2 U9.10 | length 142
  Top Layer w10: R38.2@6097.99,2610 U9.10@6240,2610
NetR39_1: R39.1 U8.6 | length 560.6
  Top Layer w8.66: U8.6@5644.37,2234.05 5824.05,2234.05 5895,2305 5895,2400 6005,2510 R39.1@6035,2510
NetR39_2: R39.2 U9.11 | length 142
  Top Layer w10: R39.2@6097.99,2510 U9.11@6240,2510
NetR40_2: R40.2 U10.2 | length 118
  Top Layer w7.87: U10.2@4672.2,1834.97 4672.2,1742.17 R40.2@4690,1724.37
NetR41_1: R41.1 U8.5 | length 490.7
  Top Layer w8.66: U8.5@5644.37,2214.37 5839.37,2214.37 5920,2295 5920,2325 6005,2410 R41.1@6036.5,2410
NetR41_2: R41.2 U9.12 | length 140.5
  Top Layer w10: R41.2@6099.49,2410 U9.12@6240,2410
NetR42_2: R42.2 U6.6 | length 104.4
  Top Layer w0.66: 5075.84,2110 R42.2@5101.5,2110
  Top Layer w8.66: R42.2@5100,2110 5100,2102.22 5111.42,2090.8 5165.95,2090.8 U6.6@5166.12,2090.63
NetR43_1: R43.1 U8.4 | length 438.4
  Top Layer w8.66: U8.4@5644.37,2194.68 5854.68,2194.68 5970,2310 R43.1@6035,2310
NetR43_2: R43.2 U9.13 | length 142
  Top Layer w10: R43.2@6097.99,2310 U9.13@6240,2310
NetR44_2: R44.2 U10.8 | length 77.2
  Top Layer w10: R44.2@4569.48,2005.03 U10.8@4646.61,2005.03
NetR45_1: R45.1 U8.3 | length 405.1
  Top Layer w8.66: U8.3@5644.37,2175 5870,2175 5905,2210 R45.1@6035,2210
NetR45_2: R45.2 U9.14 | length 142
  Top Layer w10: R45.2@6097.99,2210 U9.14@6240,2210
NetR47_1: R47.1 U8.2 | length 409.4
  Top Layer w7.87: U8.2@5644.37,2155.31 5934.69,2155.31 5980,2110 R47.1@6035,2110
NetR47_2: R47.2 U9.15 | length 142
  Top Layer w10: R47.2@6097.99,2110 U9.15@6240,2110
NetR48_2: R48.2 U6.7 | length 86.8
  Top Layer w8.66: R48.2@5101.5,2030 5101.5,2038.86 5133.58,2070.95 U6.7@5166.12,2070.95
NetR49_2: R49.2 U6.10 | length 89.2
  Top Layer w8.66: R49.2@5101.5,1965 5101.5,1973.86 5139.36,2011.72 5165.95,2011.72 U6.10@5166.12,2011.89
NetR50_1: R50.1 U12.9 | length 415.2
  Top Layer w7.87: U12.9@5644.37,1954.37 5939.37,1954.37 5995,2010 R50.1@6036.5,2010
NetR50_2: R50.2 U9.16 | length 140.5
  Top Layer w10: R50.2@6099.49,2010 U9.16@6240,2010
NetR51_1: R51.1 U12.8 | length 400.9
  Top Layer w7.87: U12.8@5644.37,1934.69 5915.31,1934.69 5940,1910 R51.1@6035,1910
NetR51_2: R51.2 U9.17 | length 142
  Top Layer w10: R51.2@6097.99,1910 U9.17@6240,1910
NetR53_1: R53.1 U12.7 | length 434.1
  Top Layer w7.87: U12.7@5644.37,1915 5835,1915 5940,1810 R53.1@6035,1810
NetR53_2: R53.2 U9.18 | length 142
  Top Layer w10: R53.2@6097.99,1810 U9.18@6240,1810
NetR54_1: R54.1 U12.6 | length 467.4
  Top Layer w7.87: U12.6@5644.37,1895.31 5754.69,1895.31 5940,1710 R54.1@6035,1710
NetR54_2: R54.2 U9.19 | length 142
  Top Layer w10: R54.2@6097.99,1710 U9.19@6240,1710
NetR55_1: R55.1 U12.5 | length 538.7
  Top Layer w7.87: U12.5@5644.37,1875.63 5744.37,1875.63 5847.87,1772.13 5847.87,1707.13 5937.05,1617.95 6027.05,1617.95 R55.1@6035,1610
NetR55_2: R55.2 U9.20 | length 142
  Top Layer w10: R55.2@6097.99,1610 U9.20@6240,1610
NetR56_1: R56.1 U12.4 | length 617.3
  Top Layer w7.87: U12.4@5644.37,1855.94 5738.78,1855.94 5830,1764.72 5830,1625 5945,1510 R56.1@6036.5,1510
NetR56_2: R56.2 U9.21 | length 140.5
  Top Layer w10: R56.2@6099.49,1510 U9.21@6240,1510
NetR57_1: R57.1 U12.3 | length 691.4
  Top Layer w7.87: U12.3@5644.37,1836.26 5733.18,1836.26 5808.94,1760.5 5808.94,1551.06 5950,1410 R57.1@6036.5,1410
NetR57_2: R57.2 U9.22 | length 140.5
  Top Layer w10: R57.2@6099.49,1410 U9.22@6240,1410
NetR58_1: R58.1 U6.1 | length 188.5
  Top Layer w10: R58.1@5092.52,2332.48 5117.52,2332.48 5166.12,2283.88 U6.1@5166.12,2189.06
NetR59_1: R59.1 U12.2 | length 769.9
  Top Layer w7.87: U12.2@5644.37,1816.57 5727.59,1816.57 5790,1754.17 5790,1465 5945,1310 R59.1@6035,1310
NetR59_2: R59.2 U9.23 | length 142
  Top Layer w10: R59.2@6097.99,1310 U9.23@6240,1310
NetR60_1: R60.1 U9.32 | length 2298
  Top Layer w10: R60.1@5886.5,3565 6310,3565 6541.06,3333.94 6541.06,2208.94 U9.32@6840,1910
NetU6_18: U6.18 U12.18 | length 337
  Top Layer w7.87: U6.18@5288.22,1948.85 5288.22,1908.54 5360.5,1836.26 U12.18@5555,1836.26
NetU6_19: U6.19 U12.17 | length 305.9
  Top Layer w7.87: U6.19@5307.9,1948.85 5307.9,1914.13 5366.09,1855.94 U12.17@5555,1855.94
NetU6_20: U6.20 U12.16 | length 274.8
  Top Layer w7.87: U6.20@5327.59,1948.85 5327.59,1919.72 5371.68,1875.63 U12.16@5555,1875.63
NetU6_21: U6.21 U12.15 | length 243.7
  Top Layer w7.87: U6.21@5347.27,1948.85 5347.59,1948.53 5347.59,1925 5377.28,1895.31 U12.15@5555,1895.31
NetU6_22: U6.22 U12.14 | length 212.6
  Top Layer w7.87: U6.22@5366.96,1948.85 5367.28,1948.53 5367.28,1930.59 5382.87,1915 U12.14@5555,1915
NetU6_26: U6.26 U12.13 | length 148.8
  Top Layer w7.87: U6.26@5430,1992.21 5464.51,1992.21 5522.03,1934.69 U12.13@5555,1934.69
NetU6_27: U6.27 U12.12 | length 148.8
  Top Layer w7.87: U6.27@5430,2011.89 5473.11,2011.89 5530.63,1954.37 U12.12@5555,1954.37
NetU6_28: U6.28 U12.11 | length 189.7
  Top Layer w7.87: U6.28@5430,2031.58 5489.79,2031.58 5543.52,1977.84 5588.66,1977.84 5589.84,1976.66 U12.11@5589.84,1969.53
NetU6_32: U6.32 U8.18 | length 151.8
  Top Layer w7.87: U6.32@5430,2110.32 5464.72,2110.32 5528.77,2174.37 5554.37,2174.37 U8.18@5555,2175
NetU6_33: U6.33 U8.17 | length 141.7
  Top Layer w7.87: U6.33@5430,2130 5430.32,2130.32 5459.44,2130.32 5522.86,2193.74 5544.37,2193.74 U8.17@5545,2194.37
NetU6_34: U6.34 U8.16 | length 141.7
  Top Layer w7.87: U6.34@5430,2149.69 5430.32,2150.01 5453.85,2150.01 5517.27,2213.43 5544.37,2213.43 U8.16@5545,2214.06
NetU6_35: U6.35 U8.15 | length 141.7
  Top Layer w7.87: U6.35@5430,2169.37 5430.32,2169.69 5448.26,2169.69 5512.31,2233.74 U8.15@5545,2233.74
NetU6_39: U6.39 U8.14 | length 215.5
  Top Layer w7.87: U6.39@5366.96,2212.73 5367.28,2213.05 5367.28,2230.99 5390.03,2253.74 U8.14@5555,2253.74
NetU6_40: U6.40 U8.13 | length 246.7
  Top Layer w7.87: U6.40@5347.27,2212.73 5347.59,2213.05 5347.59,2236.58 5384.44,2273.42 U8.13@5555,2273.42
NetU6_41: U6.41 U8.12 | length 277.8
  Top Layer w7.87: U6.41@5327.59,2212.73 5327.59,2241.85 5378.85,2293.11 U8.12@5555,2293.11
NetU6_42: U6.42 U8.11 | length 346.7
  Top Layer w7.87: U6.42@5307.9,2212.73 5307.9,2247.44 5372.63,2312.17 5588.66,2312.17 5589.84,2310.98 U8.11@5589.84,2308.27
NRST: C35.1 DD1.7 R30.2 | length 316.6
  Top Layer w7.87: C35.1@4430,3331.42 4433.58,3335 R30.2@4515,3335 4520.82,3340.82 4520.82,3365.82 4619.78,3464.78 4676.16,3464.78 DD1.7@4676.54,3465.16
OPAMP_OUT: C59.1 R8.2 R44.1 TP4.1 | length 277.9
  Top Layer w7.87: 4500.55,2048.9 4500.55,2049.45 ; C59.1@4537.13,2085.47 C59.1@4545,2085.47
  Top Layer w10: R8.2@4419.45,2005 R44.1@4500.55,2005 4500.55,2048.9 C59.1@4537.13,2085.47 ; TP4.1@4435,2115 4500.55,2049.45
RX: DD1.40 P6.4 | length 335.8
  Top Layer w7.87: DD1.40@4884.21,3633.46 4884.21,3709.57 4859.57,3734.21 4859.57,3783.82 4886.18,3810.43 4959.57,3810.43 P6.4@5005,3765
SWCLK: DD1.37 P6.2 | length 330.9
  Top Layer w7.87: DD1.37@4943.27,3633.46 4943.27,3658.52 4944.78,3660.04 4945.04,3660.04 4970,3685 5125,3685 P6.2@5205,3765
SWDIO: DD1.34 P6.1 | length 426.6
  Top Layer w7.87: DD1.34@4993.46,3543.9 5123.9,3543.9 5305,3725 P6.1@5305,3765
TX: DD1.39 P6.5 | length 132
  Top Layer w7.87: DD1.39@4903.9,3633.46 4904.27,3633.84 4904.27,3764.27 P6.5@4905,3765
UCC_ENABLE: DD1.31 R26.1 | length 652.4
  Top Layer w10: DD1.31@4993.46,3484.84 5134.84,3484.84 v2(5135,3485) ; v2(5580,3450) R26.1@5580,3501.26
  Bottom Layer w10: v2(5135,3485) 5545,3485 v2(5580,3450)
VIN: C2.1 C31.1 C36.2 C37.1 C38.1 C39.1 C51.2 C57.2 L2.2 P5.1 P5.2 P6.6 TP1.1 U2.1 U2.11 U2.13 U4.3 U7.1 U7.3 U11.1 U11.3 | length 8288
  Top Layer w7.87: v2(3546.23,1381.23) 3550.5,1381.23 3562.2,1369.53 U2.11@3604.29,1369.53 ; v2(3555,1320) 3558.01,1323.01 3567.53,1323.01 3573.84,1329.33 3579.44,1329.33 3579.89,1329.78 3603.92,1329.78 U2.13@3604.29,1330.16 ; v2(3765,1235) 3765,1270.39 U2.1@3765.71,1271.1
  Top Layer w10: C36.2@4227.44,3205 C36.2@4227.44,3220.55
  Top Layer w23.62: v2(3475,1295) 3485.73,1284.27 3485.73,1260.93 3490.16,1256.5 C2.1@3500,1256.5 ; TP1.1@3790,2855 3790,2864.59 3804.81,2879.4 3804.81,2904.81 4035,3135 4155,3135 4210.24,3190.24 4217.6,3190.24 4217.6,3205 4205,3205 ; C39.1@3940,1195.47 3940.24,1195.24 4024.76,1195.24 v4(4025,1195) ; v4@4020,1195 4165,1195 4222.4,1252.4 ; C31.1@4159.53,3205 4205,3205 ; U4.3@4220.55,3305.59 4220.55,3220.55 4205,3205 ; U7.3@4603.82,1322.6 4597.13,1322.6 4595.94,1321.42 4595.94,1316.02 4524.92,1245 C51.2@4520,1245 ; U7.1@4603.82,1397.4 4603.74,1397.48 4520.08,1397.48 C57.2@4520,1397.56 4518.78,1398.78 4441.22,1398.78 C37.1@4440,1400 4370,1400 4222.4,1252.4 ; U11.3@4611.08,1172.6 4612.42,1173.93 4628.7,1173.93 4651.39,1196.63 4651.39,1223.37 4628.7,1246.07 4612.42,1246.07 U11.1@4611.08,1247.4 4605.73,1247.4 4598.13,1255 4548.6,1255 4548.44,1254.84 4529.84,1254.84 C51.2@4520,1245 ; v2(5833.04,3422.03) 5835,3420.07 L2.2@5835,3330.55 ; 4222.4,1252.4 C38.1@4440,1252.4 4512.6,1252.4 C51.2@4520,1245
  Bottom Layer w10: 3527.15,1297.15 3535,1305 3536.31,1305 3551.31,1320 v2(3555,1320) 3555.08,1320.08 3555.08,1368.7 3546.23,1377.55 v2(3546.23,1381.23)
  Bottom Layer w23.62: v2(3475,1295) 3473.66,1296.34 3473.66,1350.63 ; v2(3765,1235) 3725,1195 ; TP1.1@3770,2855 3765,2860 P5.1@3630,2860 ; v4@4020,1195 3725,1195 ; v2(5833.04,3422.03) 5833.04,3494.56 5509.3,3818.31 4858.31,3818.31 P6.6@4805,3765 3855.18,3765 3710,3619.82 3710,2940 P5.1@3630,2860 ; 3473.66,1350.63 3473.66,2803.66 P5.2@3530,2860 P5.1@3630,2860 ; 3473.66,1350.63 3527.15,1297.15 3629.29,1195 3725,1195
VLASER: C29.2 D3.2 L1.1 R18.2 R22.2 TP6.1 | length 942.8
  Top Layer w10: L1.1@5235,3494.45 5235,3460 v2(5275,3420) ; v2(5535,3215) 5563.11,3186.89 R18.2@5563.11,3140 ; C29.2@5563.11,3046.75 C29.2@5560,3043.64 C29.2@5575.26,3043.64 ; D3.2@5636.54,3140 D3.2@5646.26,3130.28 ; TP6.1@5658.9,2960 TP6.1@5665,2960
  Top Layer w20: C29.2@5563.11,3046.75 R18.2@5563.11,3140 D3.2@5636.54,3140 ; C29.2@5575.26,3043.64 TP6.1@5658.9,2960 ; R22.2@5646.26,3055 D3.2@5646.26,3130.28
  Bottom Layer w10: v2(5275,3420) 5275,3385 5445,3215 v2(5535,3215)
pads on no net: DD1.2 DD1.3 DD1.4 DD1.11 DD1.12 DD1.13 DD1.14 DD1.16 DD1.18 DD1.19 DD1.20 DD1.21 DD1.22 DD1.25 DD1.26 DD1.27 DD1.28 DD1.29 DD1.30 DD1.32 DD1.33 DD1.38 DD1.41 DD1.42 DD1.43 DD1.45 DD1.46 U1.1 U1.2 U1.3 U2.8 U2.9 U5.3 U5.5 U6.29 U6.43 U7.4 U8.21 U9.1 U9.2 U9.3 U9.4 U9.5 U9.6 U9.24 U9.26 U9.27 U9.28 U9.30 U9.31 U9.33 U9.34 U9.35 U9.36 U9.37 U9.38 U9.39 U9.40 U9.41 U9.42 U9.43 U9.44 U9.45 U9.46 U9.47 U9.48 U10.7 U11.4 U12.21 X1.2 X1.4

## Polygon pours and split planes (outlines as drawn)
GND on Bottom Layer "LGND" (solid, pour order 18): 5259.29,3840 3295,3840 3295,1115 7030,1115 7030.3,3840 6065,3840 6067.91,2898.1 5822.91,2653.1 4647.91,2653.1 4507.91,2793.1 4507.91,3108.1 4562.91,3163.1 4962.91,3163.1 5052.91,3253.1 5052.91,3533.1 5267.91,3748.1 5267.91,3833.1
GND on Bottom Layer "GND_L04_P006" (solid, pour order 6): 5403.04,3732.03 5763.04,3732.03 5788.04,3707.03 5788.04,3467.03 5833.04,3422.03 5958.04,3422.03 5998.04,3382.03 5998.04,2952.03 5763.04,2717.03 4688.04,2717.03 4583.04,2822.03 4583.04,3037.03 4638.04,3092.03 4968.04,3092.03 5093.04,3217.03 5088.04,3222.03 5088.04,3482.03 5278.04,3672.03 5343.04,3672.03
GND on Top Layer "LGND" (solid, pour order 27): 5259.29,3840 3295,3840 3295,1115 7030,1115 7030.3,3840 6065,3840 6067.91,2898.1 5822.91,2653.1 4647.91,2653.1 4507.91,2793.1 4507.91,3108.1 4562.91,3163.1 4962.91,3163.1 5052.91,3253.1 5052.91,3533.1 5267.91,3748.1 5267.91,3833.1
GND on Top Layer "GND_L01_P008" (solid, pour order 8): 5403.04,3732.03 5763.04,3732.03 5788.04,3707.03 5788.04,3467.03 5833.04,3422.03 5958.04,3422.03 5998.04,3382.03 5998.04,2952.03 5763.04,2717.03 4688.04,2717.03 4583.04,2822.03 4583.04,3037.03 4638.04,3092.03 4968.04,3092.03 5093.04,3217.03 5088.04,3222.03 5088.04,3482.03 5278.04,3672.03 5343.04,3672.03
GND on Layer 2 "LGND" (solid, pour order 28): 5256.82,3840 3295,3840 3295,1115 7030,1115 7030.3,3838.03 6065,3838.03 6067.91,2896.13 5822.91,2651.13 4647.91,2651.13 4507.91,2791.13 4507.91,3106.13 4562.91,3161.13 4962.91,3161.13 5052.91,3251.13 5052.91,3531.13 5267.91,3746.13 5267.91,3831.13
GND on Layer 2 "GND_L03_P023" (solid, pour order 23): 5345,3760 5252.56,3799.95 5252.56,3840 5320,3840 5523.01,3840 5637.89,3729.52 5345,3631.45
GND on Layer 2 "GND_L03_P007" (solid, pour order 7): 5403.04,3732.03 5763.04,3732.03 5788.04,3707.03 5788.04,3467.03 5833.04,3422.03 5958.04,3422.03 5998.04,3382.03 5998.04,2952.03 5763.04,2717.03 4688.04,2717.03 4583.04,2822.03 4583.04,3037.03 4638.04,3092.03 4968.04,3092.03 5093.04,3217.03 5088.04,3222.03 5088.04,3482.03 5278.04,3672.03 5343.04,3672.03
ADC_AVDD on Layer 2 "LGND" (solid, pour order 14): 4990,2625 5400,2625 5400,2280 5255,2135 5255,1255 5145,1255 5105,1295 4990,1295 4990,2580 4990,2590
ADC_OVDD on Layer 2 "LGND" (solid, pour order 15): 5275,1260 5285,1270 5285,2130 5425,2270 5425,2630 5660,2630 5845,2445 5845,1535 5725,1415 5550,1415 5550,1400 5410,1260
GND on Layer 1 "LGND" (solid, pour order 29): 5259.66,3838.86 3295.38,3838.86 3295.38,1113.86 7030.38,1113.86 7030.68,3838.86 6065.38,3838.86 6068.28,2896.96 5823.28,2651.96 4648.28,2651.96 4508.28,2791.96 4508.28,3106.96 4563.28,3161.96 4963.28,3161.96 5053.28,3251.96 5053.28,3531.96 5268.28,3746.96 5268.28,3831.96
GND on Layer 1 "GND_L02_P004" (solid, pour order 4): 5404.27,3731.63 5764.27,3731.63 5789.27,3706.63 5789.27,3466.63 5834.27,3421.63 5959.27,3421.63 5999.27,3381.63 5999.27,2951.63 5764.27,2716.63 4689.27,2716.63 4584.27,2821.63 4584.27,3036.63 4639.27,3091.63 4969.27,3091.63 5094.27,3216.63 5089.27,3221.63 5089.27,3481.63 5279.27,3671.63 5344.27,3671.63

## Silkscreen, mask and mechanical layers (free items; w line width, h text height)
Top Overlay:
  text "PA Combined V1" at 6830,3765 h60 r180
Mechanical 1:
  the board outline again, w10

## Text inside footprints (layer, text, board x,y; h text height)
P3: Top Overlay "3" at 3525,2025 h25 r270; Top Overlay "4" at 3625,2025 h25 r270; Top Overlay "2" at 3625,2275 h25 r270; Top Overlay "1" at 3525,2265 h25 r270
P4: Top Overlay "2" at 3550,2930 h25 r90; Top Overlay "1" at 3650,2950 h25 r90; Top Overlay "7" at 3650,3390 h25 r90; Top Overlay "8" at 3550,3390 h25 r90
P7: Top Overlay "3" at 5190,1255 h25 r270; Top Overlay "4" at 5290,1255 h25 r270; Top Overlay "2" at 5290,1515 h25 r270; Top Overlay "1" at 5190,1495 h25 r270